# Altium PCB Main.PcbDoc
Units mil, origin at the board's own origin, x right, y up, seen from the top; angles counter-clockwise.
Board outline 925 x 925 mil, 2 copper layers (Top Layer, Bottom Layer); 28 components, 21 nets, 102 pads, 23 vias.
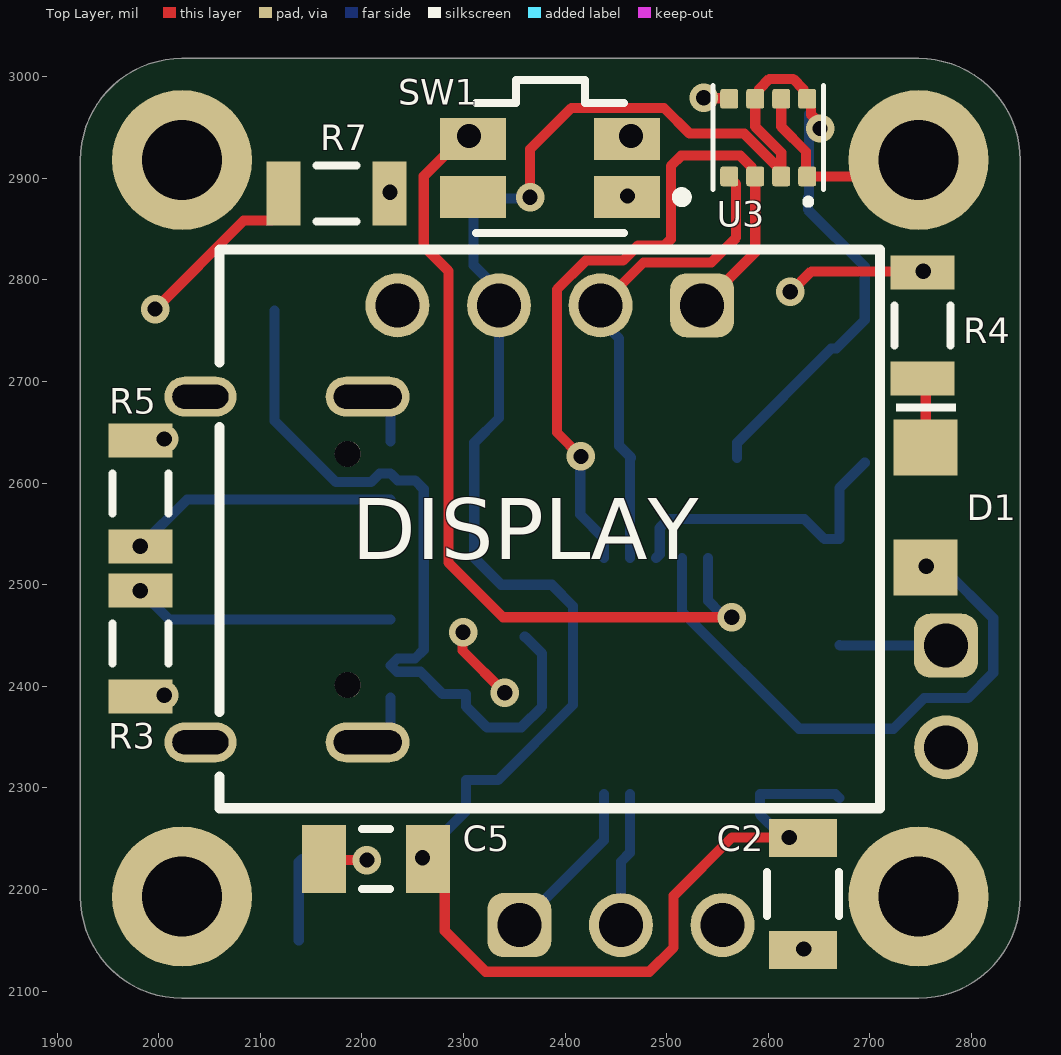
[diagram p0: Top Layer view]
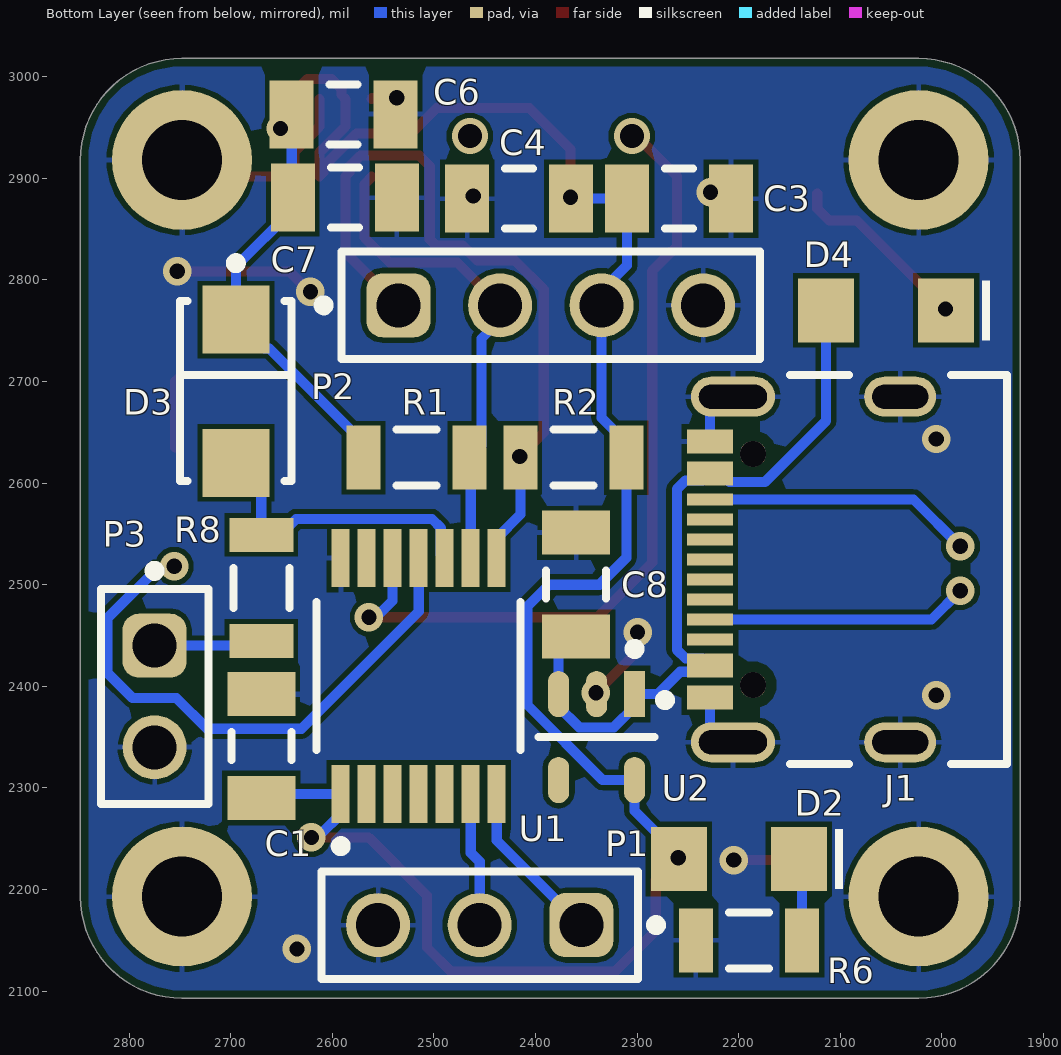
[diagram p1: Bottom Layer view, seen from below]
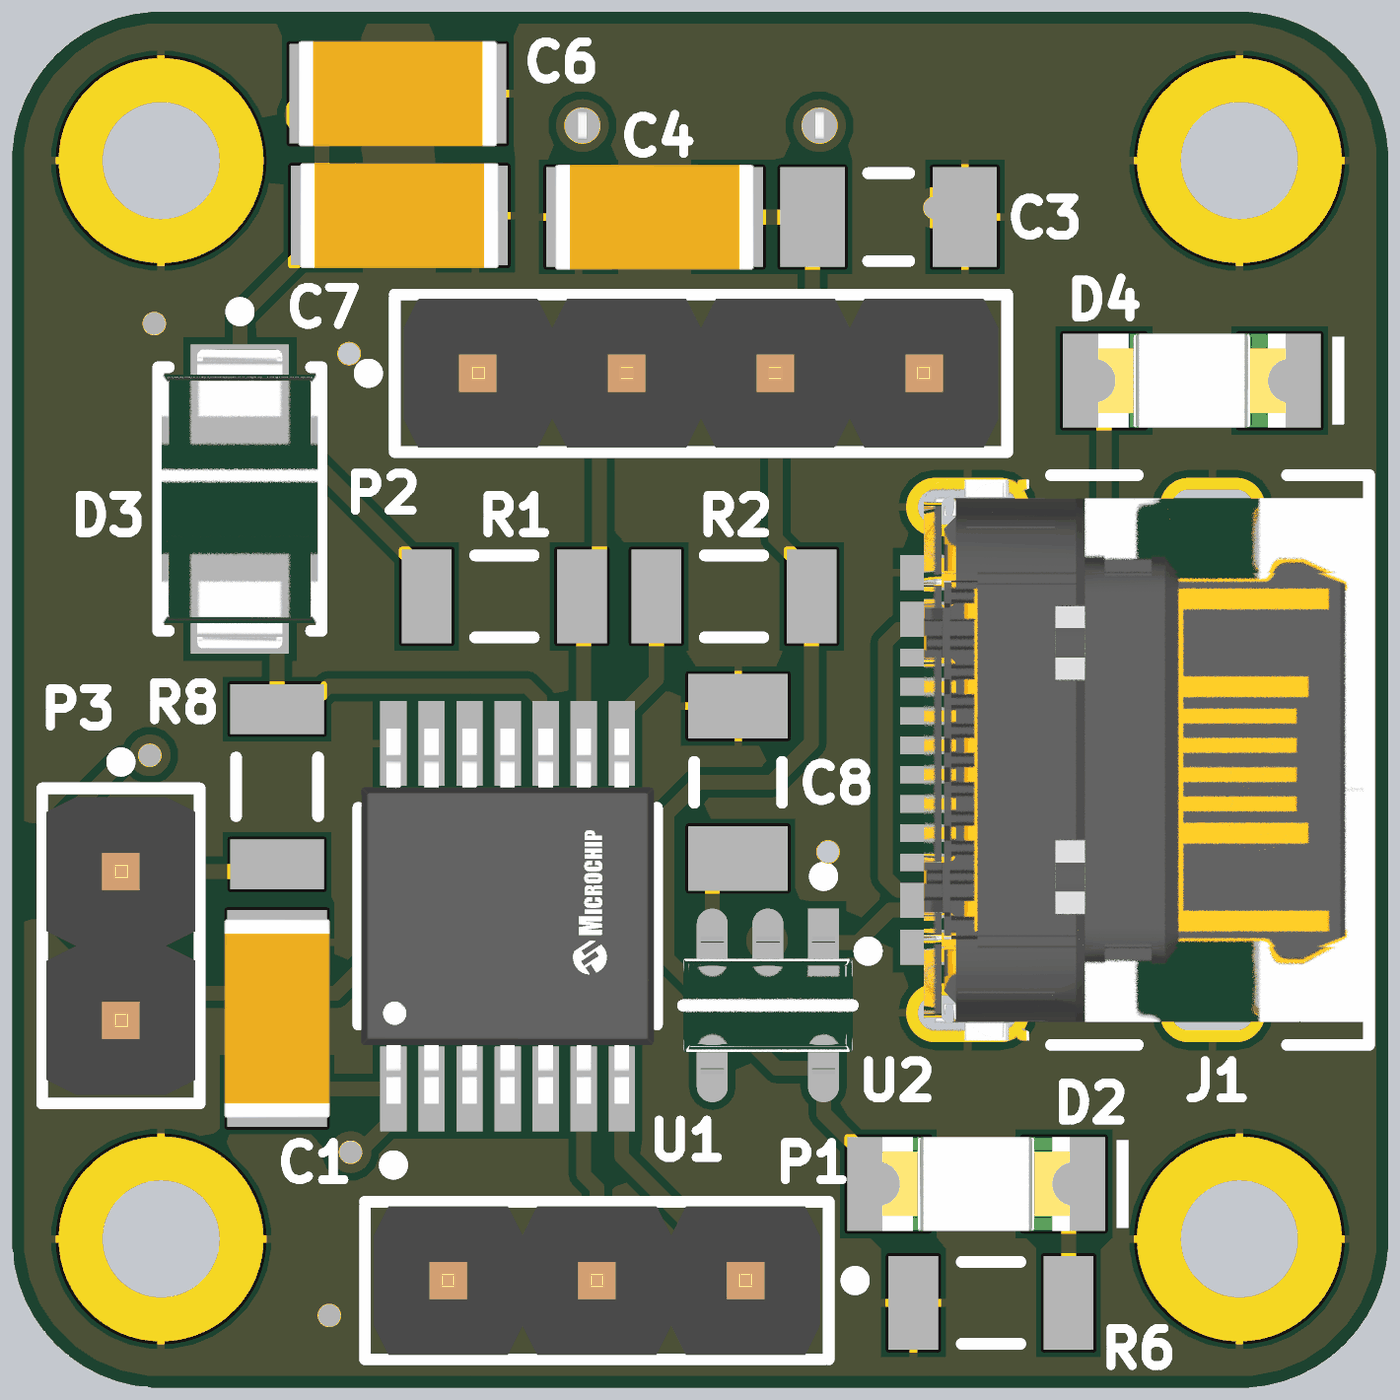
[diagram p2: 3D render of the assembled board from below, using the file's embedded part models]

## Layer stack, top to bottom
Top Solder: solder mask 0.4, Solder Resist, Dk 3.5
Top Layer: signal copper 1.4
Dielectric 1: dielectric 12.6, FR-4, Dk 4.8
Bottom Layer: signal copper 1.4
Bottom Solder: solder mask 0.4, Solder Resist, Dk 3.5

## Board outline
1923,2193 1923,2918 cw(c2023,2918) 2023,3018 2748,3018 cw(c2748,2918) 2848,2918 2848,2193 cw(c2748,2193) 2748,2093 2023,2093 cw(c2023,2193)

## Design rules (kind name [scope] priority, off if disabled: settings)
BoardOutlineClearance [All] p1: gap=7.87 ignorepadtopadclearanceinfootprint=FALSE
Clearance [All] p1: gap=5 ignorepadtopadclearanceinfootprint=TRUE except(10: Arc-Hole Track-Hole SMDPad-Hole THPad-Hole Via-Hole Fill-Hole Poly-Hole Region-Hole Text-Hole)
ComponentClearance [All] p1: gap=5 collisioncheckmode=3 verticalgap=5 showdistances=TRUE
DiffPairsRouting [All] p1: maxlimit=10 minlimit=5 mostfreqgap=5 toplayer_minwidth=5 toplayer_maxwidth=1000 toplayer_prefwidth=5 bottomlayer_minwidth=5 bottomlayer_maxwidth=1000 bottomlayer_prefwidth=5 maxuncoupledlength=500
Height [All] p1: minheight=0 maxheight=71497.94 prefheight=500
HoleSize [All] p1: absolutevalues=TRUE maxlimit=248.03 minlimit=11.81 maxpercent=80.000 minpercent=20.000
HoleToHoleClearance [All] p1: gap=10 allowstackedmicrovias=FALSE
MinimumAnnularRing [All] p1: minimumring=6
MinimumSolderMaskSliver [All] p1: minsoldermaskwidth=6
PlaneClearance [All] p1: clearance=5
PlaneConnect PlaneConnectPowerPads [InPadClass('PowerPads')] p1: planeconnectstyle=Direct reliefexpansion=20 reliefentries=4 reliefconductorwidth=10 reliefairgap=10
PlaneConnect [All] p2: pad.planeconnectstyle=Relief pad.reliefexpansion=11.81 pad.reliefentries=4 pad.reliefconductorwidth=5 pad.reliefairgap=5 via.planeconnectstyle=Direct via.reliefexpansion=11.81 via.reliefentries=4 via.reliefconductorwidth=5 via.reliefairgap=5
PolygonConnect PolygonConnectPowerPads [All vs (InPadClass('PowerPads'))] p1: connectstyle=Direct reliefconductorwidth=10 reliefentries=4 polygonreliefangle="90 Angle" airgapwidth=10
PolygonConnect [All] p2: thpad.connectstyle=Relief thpad.reliefconductorwidth=5 thpad.reliefentries=4 thpad.polygonreliefangle="90 Angle" thpad.airgapwidth=5 smdpad.connectstyle=Relief smdpad.reliefconductorwidth=5 smdpad.reliefentries=4 smdpad.polygonreliefangle="90 Angle" smdpad.airgapwidth=5 via.connectstyle=Direct via.reliefconductorwidth=5 via.reliefentries=4 via.polygonreliefangle="90 Angle" via.airgapwidth=5
RoutingVias [All] p1: holewidth=11.81 width=23.62 viastyle="Through Hole" minholewidth=11.81 minwidth=23.62 maxholewidth=23.62 maxwidth=259.84
SilkToSilkClearance [All] p1: silktosilkclearance=5
SilkToSolderMaskClearance [IsPad] p1: minsilkscreentomaskgap=5 clearancetoexposedcopper=TRUE
SolderMaskExpansion [All] p1: expansion=2 istentingtop=FALSE
SupplyNets "Schematic Supply Nets_2" [InNet('GND')] p1: voltage=0.000
SupplyNets "Schematic Supply Nets_1" [InNet('5V0')] p2: voltage=0.000
SupplyNets "Schematic Supply Nets" [InNet('3V3')] p3: voltage=0.000
UnRoutedNet [All] p1: checkbadconnections=TRUE
Width Width_10mil [All] p1: maxlimit=1000 minlimit=10 preferedwidth=10 minimp=50.000000 maximp=50.000000 favimp=50.000000
Width Width_6mil [All] p2: maxlimit=1000 minlimit=6 preferedwidth=6 minimp=50.000000 maximp=50.000000 favimp=50.000000
Width Power_20mil [All] p3: maxlimit=1000 minlimit=20 preferedwidth=20 minimp=50.000000 maximp=50.000000 favimp=50.000000
Width Power_12mil [All] p4: maxlimit=1000 minlimit=12 preferedwidth=12 minimp=50.000000 maximp=50.000000 favimp=50.000000
Width Width_5mil [All] p5: maxlimit=1000 minlimit=5 preferedwidth=5 minimp=50.000000 maximp=50.000000 favimp=50.000000
19 further rules are at their usual default settings.

## Components (designator, comment, footprint, x,y, rotation, side; value= is the part's Value field where it differs from the comment)
C1 "0.1µF" CAPC3216X100X50LL20T25 2670,2341.18 r270 bottom
C2 "10nF" FP-C1206C-EB-MFG 2634.28,2195.4 r270 top value="10,000 pF"
C3 "1µF" CAPC3216X110X50LL20T25 2258.82,2880 r0 bottom
C4 "0.1µF" CAPC3216X100X50LL20T25 2416.18,2880 r180 bottom
C5 "1µF" CAPC3216X110X50LL20T25 2213.82,2230 r180 top
C6 "0.1µF" CAPC3216X100X50LL20T25 2588.82,2963 r180 bottom
C7 "0.1µF" CAPC3216X100X50LL20T25 2587.82,2881 r180 bottom
C8 "1µF" CAPC3216X110X50LL20T25 2360,2500 r90 bottom
D1 "150120RS75000" WL-SMCW_1206_150120xx75000 2755,2575.94 r270 top
D2 "150120GS75000" WL-SMCW_1206_150120xx75000 2200,2230 r0 bottom
D3 "SS14-E3/61T" FP-95400-MFG 2695,2690.47 r270 bottom
D4 "150120YS75000" WL-SMCW_1206_150120xx75000 2055,2770 r0 bottom
J1 "USB4105-GF-A" FP-USB4105-GF-A-MFG 2087,2515 r90 bottom locked
P1 "61300311121" 61300311121 2455,2165 r0 bottom
P2 "61300411121" 61300411121 2385,2775 r180 bottom locked
P3 "61300211121" 61300211121 2775,2390 r270 bottom
R1 "10kΩ" RESC3116X65X40LL10T20 2517.17,2625 r0 bottom
R2 "10kΩ" RESC3116X65X40LL10T20 2362.83,2625 r180 bottom
R3 "5.1kΩ" RESC3116X65X40LL10T20 1982,2442 r270 top
R4 "1kΩ" RESC3116X65X40LL10T20 2752,2755 r270 top
R5 "5.1kΩ" RESC3116X65X40LL10T20 1982,2590 r90 top
R6 "1kΩ" RESC3116X65X40LL10T20 2190,2150 r0 bottom
R7 "1kΩ" RESC3116X65X40LL10T20 2175,2885 r0 top
R8 "1kΩ" RESC3116X65X40LL10T20 2670,2497 r270 bottom
SW1 "EVQ-9P701P" FP-EVQ-9P701P-MFG 2385,2910 r0 top locked
U1 "ATTINY3224-XU" FP-C04-087-ST-MFG 2515,2410 r90 bottom
U2 "MIC5317-3.3YM5-TR" FP-SOT23-5LD-PL-1-IPC_C 2340,2350 r270 bottom
U3 "BME280" PSON65P250X250X100-8N 2600,2940 r270 top

## Footprints (in the part's own frame and the unit in brackets; to place one, negate y for a bottom-side part, rotate by r counter-clockwise, add the part's x,y. Pads: shape width x height; smd on the part's side, far side on the other; paste and mask are expansions set on the pad)
61300211121 [mm] "Pin Header, pitch 2.54 mm, THT, Vertical, single row, 2p"
  rrect50% 1.6x1.6 hole 1.1: 1(-1.27,0)
  round 1.6 hole 1.1: 2(1.27,0)
  silkscreen extent -3.26,-1.35 2.69,1.35, body extent -2.54,-1.27 2.54,1.27, height 8.57
61300311121 [mm] "Pin Header, pitch 2.54 mm, THT, Vertical, single row, 3p"
  rrect50% 1.6x1.6 hole 1.1: 1(-2.54,0)
  round 1.6 hole 1.1: 2(0,0) 3(2.54,0)
  silkscreen extent -4.53,-1.35 3.96,1.35, body extent -3.81,-1.27 3.81,1.27, height 8.57
61300411121 [mm] "Pin Header, pitch 2.54 mm, THT, Vertical, single row, 4p"
  rrect50% 1.6x1.6 hole 1.1: 1(-3.81,0)
  round 1.6 hole 1.1: 2(-1.27,0) 3(1.27,0) 4(3.81,0)
  silkscreen extent -5.8,-1.35 5.23,1.35, body extent -5.08,-1.27 5.08,1.27, height 8.57
CAPC3216X100X50LL20T25 [mm] "Chip Capacitor, 2-Leads, Body 3.4x1.8mm, IPC High Density"
  rect 1.1x1.7 smd: 1(-1.3,0) 2(1.3,0)
  silkscreen extent -0.35,-0.75 0.35,0.75, body extent -1.7,-0.9 1.7,0.9, height 1
CAPC3216X110X50LL20T25 [mm] "Chip Capacitor, 2-Leads, Body 3.20x1.60mm, IPC High Density"
  rect 1.1x1.7 smd: 1(-1.3,0) 2(1.3,0)
  silkscreen extent -0.35,-0.75 0.35,0.75, body extent -1.7,-0.9 1.7,0.9, height 1.1
FP-95400-MFG [mm]
  rect 1.7x1.68 smd paste+0 mask+0: 1(-1.79,0) 2(1.79,0)
  silkscreen extent -3.32,-1.4 2.25,1.4, body extent -2.55,-1.34 2.55,1.33, height 2.29
FP-C04-087-ST-MFG [mm]
  rect 1.45x0.45 smd paste+0 mask+0: 1(-2.95,1.95) 2(-2.95,1.3) 3(-2.95,0.65) 4(-2.95,0) 5(-2.95,-0.65) 6(-2.95,-1.3) 7(-2.95,-1.95) 8(2.95,-1.95) 9(2.95,-1.3) 10(2.95,-0.65) 11(2.95,0) 12(2.95,0.65) 13(2.95,1.3) 14(2.95,1.95)
  silkscreen extent -4.37,-2.55 1.85,2.55, body extent -3.2,-2.5 3.2,2.5, height 1.2
FP-C1206C-EB-MFG [mm]
  rect 0.95x1.7 smd paste+0 mask+0: 1(-1.4,0) 2(1.4,0)
  silkscreen extent -0.55,-0.9 0.55,0.9, body extent -1.6,-0.8 1.6,0.8, height 0.88
FP-EVQ-9P701P-MFG [mm]
  rect 1.65x1.05 smd paste+0 mask+0: 1(1.925,-0.725) 1'(-1.925,-0.725) 2(1.925,0.725) 2'(-1.925,0.725)
  silkscreen extent -1.85,-1.63 3.43,2.2, body extent -2.85,-1.65 2.85,2.3, height 0.25
FP-SOT23-5LD-PL-1-IPC_C [mm]
  rect 1.156x0.53 smd paste+0 mask+0: 1(-1.075,0.95)
  rrect100% 1.156x0.53 smd paste+0 mask+0: 2(-1.075,0) 3(-1.075,-0.95) 4(1.075,-0.95) 5(1.075,0.95)
  silkscreen extent -2.33,-1.45 0,1.45, body extent -1.4,-1.45 1.4,1.45, height 1.45
FP-USB4105-GF-A-MFG [mm]
  rrect100% 1x2.1 hole 1.7 slot 0.6 at 0 deg paste-2539.97 mask+0: 1(-4.32,3.015) 2(4.32,3.015)
  rrect100% 1x1.8 hole 1.4 slot 0.6 at 0 deg paste-2539.97 mask+0: 3(-4.32,-1.165) 4(4.32,-1.165)
  rect 0.6x1.15 smd paste+0 mask+0: A1-B12(-3.2,3.59) A4-B9(-2.4,3.59) B1-A12(3.2,3.59) B4-A9(2.4,3.59)
  rect 0.3x1.15 smd paste+0 mask+0: A5(-1.25,3.59) A6(-0.25,3.59) A7(0.25,3.59) A8(1.25,3.59) B5(1.75,3.59) B6(0.75,3.59) B7(-0.75,3.59) B8(-1.75,3.59)
  round 0.65 hole 0.65 unplated paste-2539.97 mask+0: ""(-2.89,2.515) ""(2.89,2.515)
  silkscreen extent -4.86,-3.84 4.86,4.84, body extent -4.79,-3.76 4.79,3.77, height 3.26
PSON65P250X250X100-8N [mm]
  rrect25% 0.49x0.45 smd: 1(0.97,0.975) 2(0.97,0.325) 3(0.97,-0.325) 4(0.97,-0.975) 5(-0.97,-0.975) 6(-0.97,-0.325) 7(-0.97,0.325) 8(-0.97,0.975)
  silkscreen extent -1.3,-1.39 1.65,1.39
RESC3116X65X40LL10T20 [mm] "Chip Resistor, 2-Leads, Body 3.10x1.60mm, IPC High Density"
  rect 0.85x1.6 smd: 1(-1.325,0) 2(1.325,0)
  silkscreen extent -0.5,-0.7 0.5,0.7, body extent -1.6,-0.85 1.6,0.85, height 0.65
WL-SMCW_1206_150120xx75000 [mm] "SMD Mono-color Chip LED, body 3.2x1.6mm"
  rect 1.4x1.6 smd: 1(-1.5,0) 2(1.5,0)
  silkscreen extent -2.6,-0.75 -2.4,0.75, body extent -1.6,-0.8 1.6,0.8, height 0.68

## Part data
C1 C4 C6 C7: library part CMP-1664-00001-4, "Chip Capacitor, 100 nF, +/- 10%, 25 V, -55 to 125 degC, 1206 (3216 Metric), RoHS, Tape and Reel", Manufacturer=Kemet, Max Operating Temperature="125 degC", Min Operating Temperature="-55 degC", Package Quantity=4000, Voltage Rating="25 V", ComponentLink1Description="Manufacturer URL", ComponentLink1URL=http://www.kemet.com/, ComponentLink2Description=Datasheet, ComponentLink2URL=http://www.kemet.com/docfinder?Partnumber=C1206F104K3RACTU, DatasheetVersion=02/2016, Height="0.78 mm", Length="3.2 mm", Mounting Technology="Surface Mount", PackageDescription="2-Pin Surface Mount Device, Body 3.2 x 1.6 mm", PackageReference=1206, Packaging="Tape and Reel", REACH SVHC="No SVHC", RoHSCompliant=true
C2: library part CMP-03020-003656-1, "CAP CER 10000PF 100V X7R 1206", Capacitance="10,000 pF", Manufacturer=KEMET, Manufacturer Part Number=C1206C103J1RACTU, Package=C1206C-EB, Temperature="-55°C to +150°C", Temperature Characteristic=X7R, Temperature Coefficient=15%, Temperature Range High=+150°C, Temperature Range Low=-55°C, Tolerance=0.05, Voltage Rating="100 V", Automotive=Yes, Automotive Grade="Grade 0", Category=Cap, ComponentLink2Description=Datasheet, ComponentLink2URL=https://content.kemet.com/datasheets/KEM_C1007_X8R_ULTRA_150C_SMD.pdf, Device Class L1="Passive Components", Device Class L2=Capacitors, Device Class L3="Ceramic Capacitors", Digikey Description="CAP CER 10000PF 100V X7R 1206", Height=0.88mm, Ipc Land Pattern Name=CAPC320160X78, Lead Free=Yes, Material=Ceramic, Mouser Description="1206 C 10nF Ceramic Multilayer Capacitor, 100 VDC, +125degC, X7R Dielec, +/-5%", Octopart=https://octopart.com/c1206c103j1ractu-kemet-121270, RoHS=TRUE
C3 C5 C8: library part CMP-2000-06011-1, "Chip Capacitor, 1 uF, +/- 10%, 50 V, -55 to 125 degC, 1206 (3216 Metric), RoHS, Tape and Reel", Capacitance=1uF, Capacitance - nF=1000nF, Case Code - in=1206, Case Code - mm=3216, Case Height=1mm, Case Length=3.2mm, Case Width=1.6mm, Dielectric=X7R, Manufacturer=Kemet, Maximum Operating Temperature=+125C, Minimum Operating Temperature=-55C, Operating Temperature Range=-55Cto+125C, Package / Case=1206(3216metric), Package Description="2-Pin Surface Mount Device, Body 3.2 x 1.6 mm", Temperature Coefficient / Code=+/-15%, Tolerance=10%, Voltage Rating=50V, Brand=Kemet, Class=Class1, Datasheet URL=http://www.kemet.com/docfinder?Partnumber=C1206C105K5RACTU, Datasheet Version=02/2016, Dimensions=1.6mmWx3.2mmLx1mmH, Factory Pack Quantity=2500, Manufacturer URL=http://www.kemet.com/, Mounting Technology=SurfaceMount, Package Reference=1206, Packaging=Reel, Product=GeneralTypeMLCCs, Product Category=MultilayerCeramicCapacitorsMLCC-SMD/SMT, RoHS=Details, Series=C1206C, Termination Style=SMD/SMT, Type=SMDMLCCX7R6.3-250VDCCommericalGrade, Voltage Rating DC=50V
D1: library part CMP-1426-00013-4, "WL-SMCW SMT Mono-Color Chip LED Waterclear", Case Code (Imperial)=1206, Case Code (Metric)=3216, Color=Red, Forward Current=100mA, Forward Voltage=2V, Max Junction Temperature (Tj)=95°C, Max Operating Temperature=85°C, Max Reverse Voltage (DC)=5V, Min Operating Temperature=-40°C, Power Dissipation=72mW, Test Current=20mA, Case/Package=1206, Dominant Wavelength=625nm, Height=680µm, Length=3.2mm, Lens Style="Clear, Rectangular", Luminous Intensity=150mcd, Mount="Surface Mount", Packaging="Tape and Reel", Peak Wavelength=630nm, REACH SVHC=Unknown, Reverse Voltage=5V, RoHS=Compliant, Viewing Angle=140°, Wavelength=625nm, Width=1.6mm
D2: library part CMP-1426-00014-4, "WL-SMCW SMT Mono-Color Chip LED Waterclear", Case Code (Imperial)=1206, Case Code (Metric)=3216, Color=Green, Forward Current=100mA, Forward Voltage=3.2V, Max Junction Temperature (Tj)=95°C, Max Operating Temperature=85°C, Max Reverse Voltage (DC)=5V, Min Operating Temperature=-40°C, Power Dissipation=105mW, Test Current=20mA, Case/Package=1206, Dominant Wavelength=525nm, Height=680µm, Length=3.2mm, Lens Style="Clear, Rectangular", Luminous Intensity=450mcd, Mount="Surface Mount", Packaging="Tape and Reel", Peak Wavelength=515nm, REACH SVHC=Unknown, Reverse Voltage=5V, RoHS=Compliant, Viewing Angle=140°, Wavelength=525nm, Width=1.6mm
D3: library part CMP-02539-000035-1, "DIODE SCHOTTKY 40V 1A DO214AC", Forward Current=1A, Manufacturer=Vishay, Max Junction Temp=+150°C, Max Repetitive Reverse Voltage=40V, Max Surge Forward Current=40A, Package=95400, Peak Reverse Current=0.2mA, Temperature="-65°C to +150°C", Temperature Range Low=-65°C, Automotive=No, Category=Diode, ComponentLink2Description=Datasheet, ComponentLink2URL=http://www.vishay.com/docs/88746/ss12.pdf, Device Class L1="Discrete Semiconductors", Device Class L2=Diodes, Device Class L3="Schottky Diodes", Digikey Description="DIODE SCHOTTKY 40V 1A DO214AC", Footprint Url=http://www.vishay.com/docs/95400/sma.pdf, Height=2.29mm, Lead Free=Yes, Manufacturer Part Number=SS14-E3/61T, Mouser Description="SS14 Series 40 V 1 A Surface Mount Schottky Barrier Rectifier - DO-214AC (SMA)", Octopart=https://octopart.com/ss14-e3%2F61t-vishay-39552847, RoHS=TRUE, Standoff Height=0mm, Temperature Range High=+150°C
D4: library part CMP-1426-00019-3, "Led, Yellow, 590 Nm, 2 V, 30 Ma, 120 Mcd Rohs Compliant: Yes", Case Code (Imperial)=1206, Case Code (Metric)=3216, Color=Yellow, Forward Current=100mA, Forward Voltage=2V, Max Operating Temperature=85°C, Max Reverse Voltage (DC)=5V, Min Operating Temperature=-40°C, Test Current=20mA, Case/Package=1206, Dominant Wavelength=590nm, Height=680µm, Length=3.2mm, Lens Style="Clear, Rectangular", Luminous Intensity=120mcd, Mount="Surface Mount", Packaging="Tape and Reel", Peak Wavelength=595nm, REACH SVHC=Unknown, RoHS=Compliant, Viewing Angle=140°, Wavelength=590nm, Width=1.6mm
J1: library part CMP-245163-000001-1, "CONN RCPT USB2.0 TYPEC 5A", Current Rating=5/6.25/1.25/0.25A, Manufacturer=GCT, Package=0, Temperature="-40°C to +85°C", Temperature Range High=+85°C, Temperature Range Low=-40°C, Voltage Rating=20V, Automotive=No, Category=Conn, ComponentLink2Description=Datasheet, ComponentLink2URL=https://gct.co/files/drawings/usb4105.pdf, Conn Orientation="Right Angle", Contact Material=Gold,Nickel, Device Class L1=Connectors, Device Class L2="USB Connectors", Device Class L3=unset, Digikey Description="CONN RCPT USB2.0 TYPEC 5A", Height=3.46mm, Is Female=yes, Lead Free=Yes, Manufacturer Part Number=USB4105-GF-A, Number Of Contacts=16, Octopart=https://octopart.com/usb4105-gf-a-gct-106627878, RoHS=TRUE, Usb Standard="USB 2.0"
P1: library part CMP-1502-01062-3, Color=Black, Contact Resistance=20mΩ, Current Rating=3A, Max Operating Temperature=105°C, Min Operating Temperature=-40°C, Operating Supply Voltage=250V, Connector Type="Male Pin", Contact Material=Copper, Contact Mating Length=5.9944mm, Contact Plating=Gold, Gender=Male, Height=8.94mm, Lead Free="Lead Free", Lead Pitch=2.54mm, Mount="Through Hole", NexarPartId=32855521, Number Of Contacts=3, Number of Pins=3, Number of Positions=3, Number of Rows=1, Orientation=Vertical, Packaging=Bulk, Pitch=2.54mm, REACH SVHC=Unknown, RoHS=Compliant, Termination=Solder, Voltage Rating=250V
P2: library part CMP-1502-01064-3, Color=Black, Contact Resistance=20mΩ, Current Rating=3A, Max Operating Temperature=105°C, Min Operating Temperature=-40°C, Operating Supply Voltage=250V, Connector Type="Male Pin", Contact Material=Copper, Contact Mating Length=5.9944mm, Contact Plating=Gold, Gender=Male, Height=8.89mm, Lead Free="Lead Free", Lead Pitch=2.54mm, Mount="Through Hole", NexarPartId=32855522, Number Of Contacts=4, Number of Pins=4, Number of Positions=4, Number of Rows=1, Orientation=Vertical, Packaging=Bulk, Pitch=2.54mm, REACH SVHC=Unknown, RoHS=Compliant, Termination=Solder, Voltage Rating=250V
P3: library part CMP-1712-00002-6, Color=Black, Contact Resistance=20mΩ, Current Rating=3A, Max Operating Temperature=125°C, Min Operating Temperature=-40°C, Operating Supply Voltage=250V, Connector Type="Male Pin", Contact Gender=Male, Contact Material=Copper, Contact Mating Length=5.9944mm, Contact Plating=Gold, Gender=Male, Height=8.94mm, Housing Material=PBT, Lead Free="Lead Free", Lead Pitch=2.54mm, Mount="Through Hole", NexarPartId=20081794, Number Of Contacts=2, Number of Pins=2, Number of Positions=2, Number of Rows=1, Orientation=Vertical, Packaging=Bulk, Pitch=2.54mm, REACH SVHC="No SVHC", RoHS=Compliant, Termination="Through Hole", Voltage Rating=250V
R1 R2: library part CMP-1014-00623-2, "Chip Resistor, 10 KOhm, +/- 1%, 0.25 W, -55 to 155 degC, 1206 (3216 Metric), RoHS, Tape and Reel", Case Code (Imperial)=1206, Case Code (Metric)=3216, Manufacturer=Yageo, Max Operating Temperature=155degC, Min Operating Temperature=-55degC, Package Description="2-Pin Surface Mount Device, Body 3.1 x 1.6 mm", Package Quantity=5000, Package Reference=1206.0, Power Rating=250mW, Resistance=10KOhm, Temperature Coefficient=100ppm/degreesC, Tolerance=1%, Voltage Rating=200V, Case/Package=1206, Composition=ThickFilm, Datasheet URL=http://www.yageo.com/NewPortal/yageodocoutput?fileName=/pdf/R-Chip/PYu-RC_Group_51_RoHS_L_5.pdf, Datasheet Version="Rev. 5, 10/2016", Depth=1.6mm, Height=0.55mm, Lead Free=LeadFree, Length=3.1mm, Manufacturer URL=http://www.yageo.com/, Military Standard=Not, Packaging=TapeandReel, REACH SVHC=Unknown, RoHSCompliant=true, Termination=SMD/SMT, Width=1.6mm
R3 R5: library part CMP-2003-03990-1, Manufacturer=Yageo, Part Number=RC1206JR-075K1L
R4 R6 R7 R8: library part CMP-2100-03678-1, "Chip Resistor, 1 KOhm, +/- 1%, 0.25 W, -55 to 155 degC, 1206 (3216 Metric), RoHS, Tape and Reel", Case Code (Imperial)=1206, Case Code (Metric)=3216, Manufacturer=Yageo, Max Operating Temperature=155degC, Min Operating Temperature=-55degC, Package Description="2-Pin Surface Mount Device, Body 3.1 x 1.6 mm", Package Reference=1206.0, Power Rating=250mW, Resistance=1KOhm, Temperature Coefficient=100ppm/degreesC, Tolerance=1%, Voltage Rating=200V, Case/Package=1206, Composition=ThickFilm, Datasheet URL=http://www.yageo.com/NewPortal/yageodocoutput?fileName=/pdf/R-Chip/PYu-RC_Group_51_RoHS_L_5.pdf, Datasheet Version="Rev. 5, 10/2016", Depth=1.6mm, Height=0.55mm, Lead Free=LeadFree, Length=3.1mm, Manufacturer URL=http://www.yageo.com/, Military Standard=Not, Packaging=TapeandReel, REACH SVHC=Unknown, RoHSCompliant=true, Termination=SMD/SMT
SW1: library part CMP-05618-000010-1, "SWITCH TACTILE SPST-NO 0.05A 12V", Contact Current Rating=50mA, Contact Resistance=500mΩ, Manufacturer=Panasonic, Operating Force=1.6N, Temperature="-20°C to +70°C", Temperature Range High=+70°C, Temperature Range Low=-20°C, Voltage Rating DC=12V, Automotive=No, Category=Switch, ComponentLink2Description=Datasheet, ComponentLink2URL=https://www3.panasonic.biz/ac/e_download/control/switch/light-touch/catalog/sw_lt_eng_3529s_side.pdf?f_cd=402906&via=ok, Device Class L1=Electromechanical, Device Class L2=Switches, Device Class L3="Tactile Switches", Digikey Description="SWITCH TACTILE SPST-NO 0.05A 12V", Electromechanical Life=100000Cycles, Height=1.55mm, Lead Free=Yes, Manufacturer Part Number=EVQ-9P701P, Mouser Description="Tactile Switches SMD 3.5X2.9MM SID-OP L SHAPED TERM 1.6N", Octopart=https://octopart.com/evq-9p701p-panasonic-58006746, Package=EVQ-9P701P, RoHS=TRUE, Throw Configuration=SPST-NO
U1: library part CMP-00252-122240563-1, "ATTINY3224-XU Microcontroller 8-Bit AVR RISC 32KB Flash 1.8V to 5.5V 14-Pin TSSOP Tube", NexarPartId=122240563
U2: library part CMP-06324-000116-1, "IC REG LINEAR 3.3V 150MA SOT23-5", Case/Package=SOT-23-5, Dropout Voltage=155mV, Max Input Voltage=6V, Max Operating Temperature=125°C, Min Current Limit=200mA, Min Input Voltage=2.5V, Min Operating Temperature=-40°C, Output Current=150mA, Output Voltage=3.3V, Package Quantity=3000, Power Supply Rejection Ratio (PSRR)=70dB, Mount="Surface Mount", Number of Outputs=1, Number of Regulators=1, Packaging="Tape and Reel", RoHS Compliant=No, Series=-
U3: "DIGITAL HUMIDITY, PRESSURE AND TEMPERATURE SENSOR<br>* Digital interface IÂ²C (up to 3.4 MHz) and SPI (3 and 4 wire, up to 10 MHz)* Supply voltage VDD main supply voltage range: 1.71 V to 3.6 V*VDDIO interface voltage range: 1.2 V to 3.6 V<br> Operating range -40â€", Package=None, Availability=Unavailable, MP=BME280, Price=None

## Free pads (board coordinates)
  round 137.79 hole 78.74: 7(2023,2193) 7(2023,2918) 7(2748,2193) 7(2748,2918)

## Via types
v1: diameter 28, hole 15, Top Layer to Bottom Layer, tented both sides, 21 vias
v2: diameter 35.43, hole 23.62, Top Layer to Bottom Layer, 2 vias

## Nets (pads, with @x,y where several pads share a name; then routed paths per layer and width w, separated by ;. In a path a pad name is that pad's centre, name@x,y a point inside that pad or via, vN(x,y) a via of type N, cw(c..) or ccw(c..) an arc to the next point about the centre after c; other vN are vias at no path point)
3V3: C1.2 C2.1 C3.2 C4.2 C5.1 C6.1 C7.1 D2.2 D3.1 P2.3 R1.2 R2.2 U1.1 U2.5 U3.2 U3.6 U3.8 | length 2504.2
  Top Layer w10: v1(2259.64,2231.24) 2281.65,2209.23 2281.65,2159.35 2322,2119 2483,2119 2506.86,2142.86 2506.86,2193.86 2564.3,2251.3 C2.1@2621.39,2251.3 ; v1(2365.59,2881.24) 2365.59,2928.59 2406.21,2969.21 2497.41,2969.21 2522.62,2944 2576.36,2944 2608.94,2911.43 2608.94,2905.67 U3.2 2612.8,2925.28 2587.2,2950.87 U3.6 2591.06,2982.05 2591.06,2987.81 2601.09,2997.83 2624.5,2997.83 2634.53,2987.81 2634.53,2982.05 U3.8 2638.39,2977.4 2642.24,2973.54 2642.24,2962.63 2651,2953.87 v1(2651,2949)
  Bottom Layer w10: D2.2@2259.06,2233.94 2302.6,2277.48 U2.5 2333.94,2307.67 2407.89,2381.61 2407.89,2478.95 2386.84,2500 2337.18,2500 2310.67,2526.51 R2.2 2310.67,2639.76 2335,2664.09 P2.3 2335,2789.34 2310,2814.34 C3.2 C4.2 ; R1.2 2569.33,2639.76 2662.05,2732.48 2666.93,2732.48 2695,2760.55 D3.1 2695,2813.19 2639,2869.19 C7.1 2640,2882 C6.1 2651,2952 v1(2651,2949) ; v1(2620.61,2251.3) 2617.16,2254.75 2611.2,2254.75 2591.77,2274.17 U1.1 2666.14,2293.86 C1.2
5V0: C8.1 D4.2 J1.A4-B9 J1.B4-A9 U2.1 U2.3 | length 753.9
  Bottom Layer w10: D4.2 2114.06,2661.43 2174.5,2600.98 2209.01,2600.98 2217.51,2609.49 J1.B4-A9 2235.15,2602.68 2252.24,2602.68 2260.98,2593.95 2260.98,2436.05 2252.24,2427.32 2235.15,2427.32 J1.A4-B9 2234.59,2414.26 2257.74,2414.26 2279.67,2392.33 U2.1 2302.6,2380.01 2323.03,2359.59 2356.97,2359.59 2377.4,2380.01 U2.3 2377.4,2432.17 2360.75,2448.82 C8.1
BUILTIN: D1.2 U1.11 | length 569
  Bottom Layer w10: U1.11 2515,2473.63 2630.41,2358.22 2723.22,2358.22 2753.35,2388.35 2796.53,2388.35 2821.53,2413.35 2821.53,2467.01 2773.5,2515.04 2759.96,2515.04 v1@2757,2518
  other v1: 2755.59,2518.13
GND: C1.1 C2.2 C3.1 C4.1 C5.2 C6.2 C7.2 C8.2 J1.1 J1.2 J1.3 J1.4 J1.A1-B12 J1.B1-A12 P1.3 P2.4 P3.2 pad.7 R3.2 R4.1 R5.2 R6.2 R7.2 SW1.1 U1.14 U2.2 U3.1 U3.5 U3.7 | length 611.7
  Top Layer w10: C5.2 2163.64,2229 v1(2205,2229) ; v1@2299,2452 2299,2435.16 v1(2340.59,2393.58) ; v1(2536.59,2979.24) 2537.11,2978.72 2561.09,2978.72 U3.5 ; U3.7 2612.8,2950.87 2637.2,2926.46 2637.2,2902.99 U3.1 2731.81,2901.81 pad.7@2748,2918 ; v1@2621,2787 2642.41,2808.41 v1(2752.59,2808.41) R4.1@2748,2813
  Bottom Layer w10: J1.1 2214.77,2344.92 2228.34,2358.49 J1.A1-B12 ; J1.2 2214.77,2685.08 2228.34,2671.51 J1.B1-A12
  other v1: 2634.86,2141.53 2005.59,2391.08 2299.59,2453.24 2005.59,2643.41 2621.59,2788.24 2461.37,2882.7 2227.75,2886.24
NetD1_1: D1.1 R4.2 | length 69.1
  Top Layer w10: R4.2 2755,2699.83 D1.1
NetD2_1: D2.1 R6.1 | length 81.3
  Bottom Layer w10: R6.1 2137.83,2226.89 D2.1
NetD4_1: D4.1 R7.1 | length 182.1
  Top Layer w10: v1(1996.53,2771.24) 2083.79,2858.5 2111.1,2858.5 2122.83,2870.24 R7.1
NetJ1_A5: J1.A5 R3.1 | length 258.1
  Bottom Layer w10: v1(1982,2494.17) 2010.38,2465.79 J1.A5
NetJ1_B5: J1.B5 R5.1 | length 265.4
  Bottom Layer w10: v1(1982,2537.83) 2028.06,2583.9 J1.B5
NetP3_1: P3.1 R8.2 | length 105.3
  Bottom Layer w10: R8.2@2670,2440.67 2670.67,2440 P3.1
PA2: SW1.2' U1.12 | length 824.1
  Top Layer w10: v2(2305.28,2941.5) 2300.35,2941.5 2260.86,2902.01 2260.86,2833.14 2285.15,2808.85 2285.15,2521.85 2339,2468 v1(2564,2468)
  Bottom Layer w10: U1.12 2540.8,2525.94 2540.8,2484.2 2553.56,2471.44 2560.56,2471.44 v1(2564,2468)
PA3: U1.13
PA4: U1.2
PA5: U1.3
PA6: U1.4
PA7: U1.5
RXD: P1.2 U1.6 | length 132.5
  Bottom Layer w10: P1.2 2455,2227.42 2463.82,2236.24 U1.6
SCL: P2.2 R1.1 U1.9 U3.4 | length 485.7
  Top Layer w10: P2.2 2477.13,2817.13 2543.84,2817.13 2568.35,2841.64 2568.35,2894.29 2561.61,2901.02 U3.4
  Bottom Layer w10: P2.2 2435,2760.66 2453.27,2742.39 2453.27,2636.73 R1.1 2463.82,2623.82 U1.9
SDA: P2.1 R2.1 U1.8 U3.3 | length 735
  Top Layer w10: v1(2415.59,2626.24) 2392,2649.83 2392,2790.68 2420.32,2819 2457,2819 2472,2834 2498.27,2834 2504.13,2839.86 2504.13,2912.13 2514.29,2922.29 2572.49,2922.29 2583.35,2911.43 2583.35,2905.67 U3.3 2587.2,2827.2 P2.1
  Bottom Layer w10: R2.1 2415,2569.05 2438.23,2545.83 U1.8
TXD: P1.1 U1.7 | length 163.3
  Bottom Layer w10: P1.1 2438.23,2248.23 U1.7
UPDI: D3.2 R8.1 U1.10 | length 305.3
  Bottom Layer w10: U1.10 2493.27,2530 2493.27,2555.95 2502,2564.68 2635.55,2564.68 2655.24,2545 2670,2545 2670,2595 D3.2
pads on no net: J1. J1.A6 J1.A7 J1.A8 J1.B6 J1.B7 J1.B8 SW1.1' SW1.2 U2.4
copper on no net:
  other v2: 2464.72,2941.5

## Polygon pours and split planes (outlines as drawn)
GND on Bottom Layer "GND_L02_P000" (solid, pour order 0): 1923,3018 2849,3018 2849,2095 2847,2093 1924,2093

## Silkscreen, mask and mechanical layers (free items; w line width, h text height)
Top Overlay:
  lines w10: 2060,2311 2060,2280 2710,2280 2710,2830 2060,2830 2060,2719 ; 2060,2375 2060,2655
  text "DISPLAY" at 2190.06,2525.01 h60
Mechanical 1:
  the board outline again, w10